# Altium PCB xv11_board.PcbDoc
Units mm, origin at the board's own origin, x right, y up, seen from the top; angles counter-clockwise.
Board outline 33.66 x 33.78 mm, 2 copper layers (Top Layer, Bottom Layer); 11 components, 7 nets, 30 pads, 0 vias.
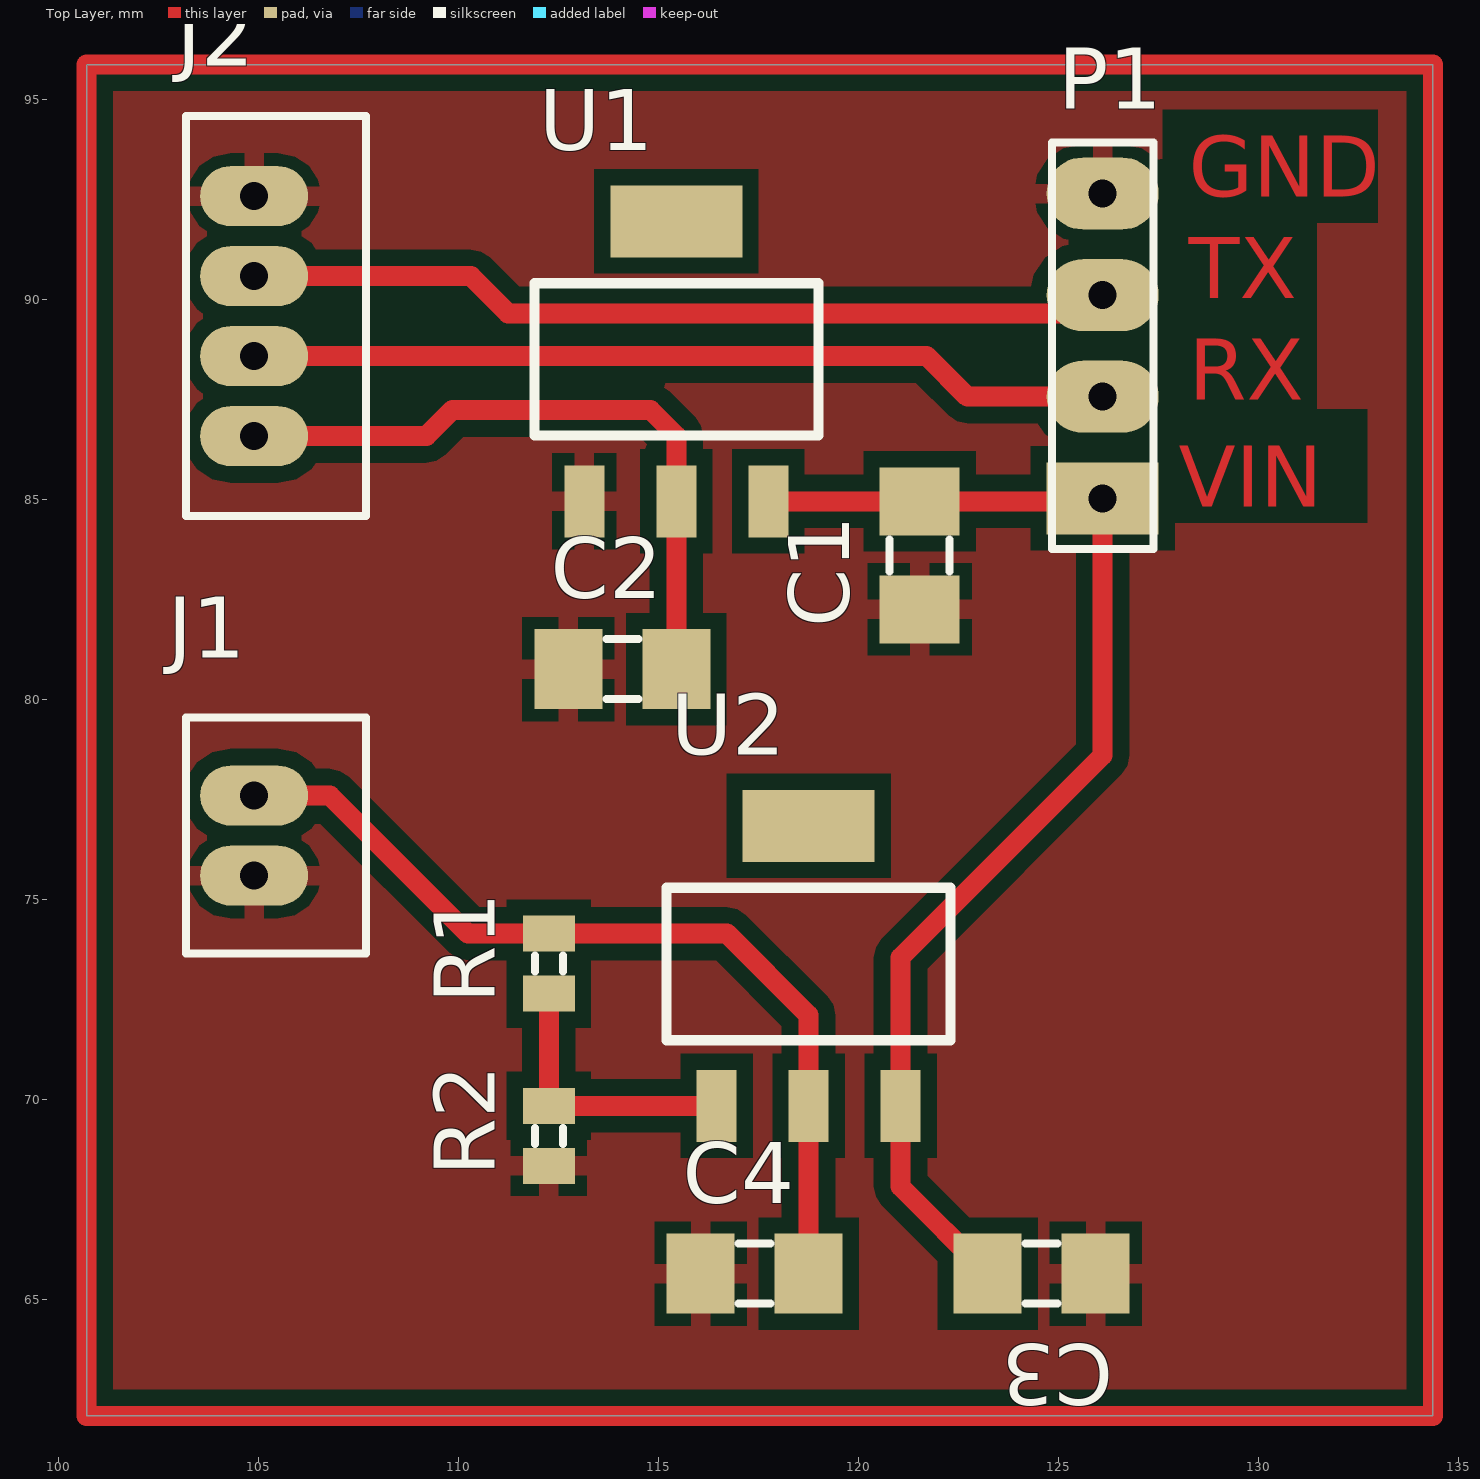
[diagram p0: Top Layer view]
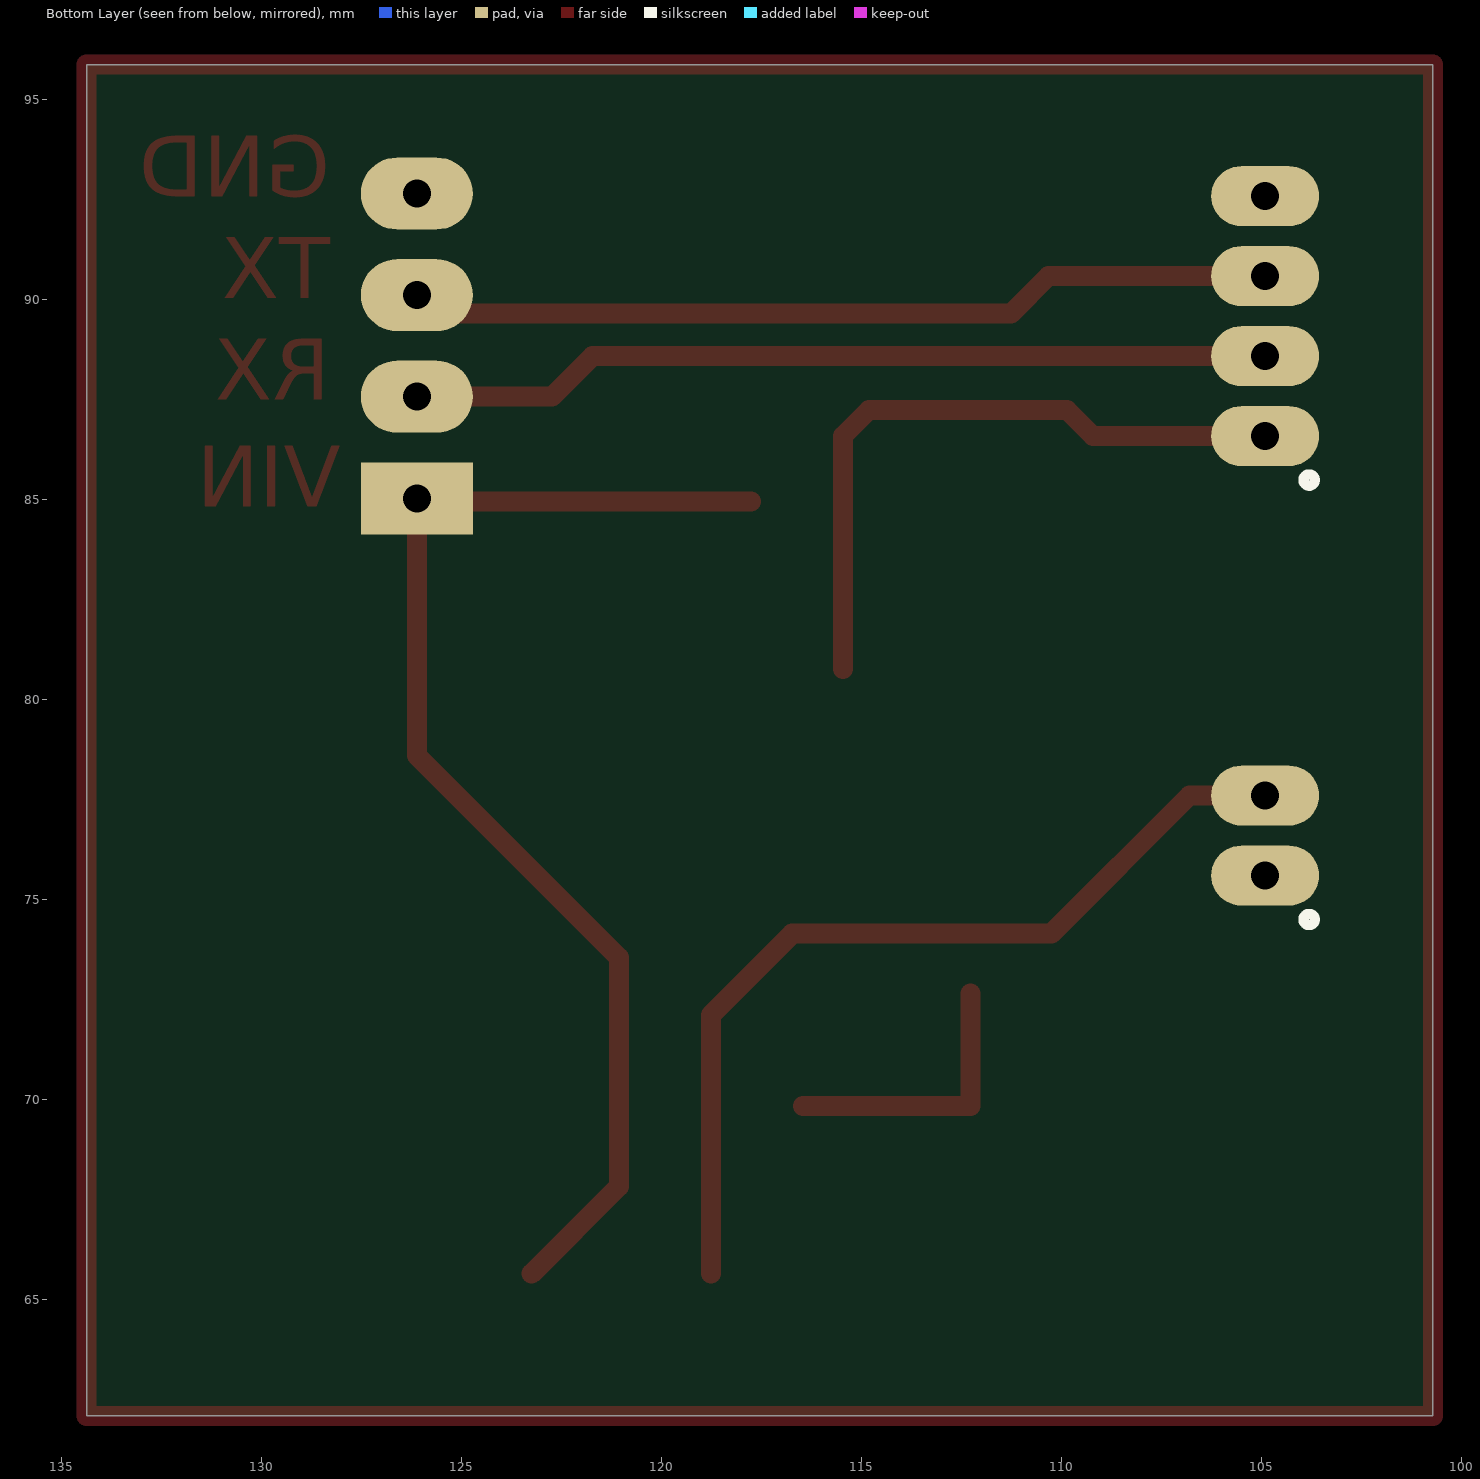
[diagram p1: Bottom Layer view, seen from below]

## Layer stack, top to bottom
Top Solder: solder mask 0.0102, Solder Resist, Dk 3.5
Top Layer: signal copper 0.0356
Dielectric 1: dielectric 0.32, FR-4, Dk 4.8
Bottom Layer: signal copper 0.0356
Bottom Solder: solder mask 0.0102, Solder Resist, Dk 3.5

## Board outline
100.711,62.103 100.711,95.885 134.366,95.885 134.366,62.103

## Design rules (kind name [scope] priority, off if disabled: settings)
Clearance [All] p1: gap=0.4
PolygonConnect [All] p1: connectstyle=Relief reliefconductorwidth=0.5 reliefentries=4 polygonreliefangle="90 Angle" airgapwidth=0.3
RoutingVias [All] p1: holewidth=0.711 width=1.27 viastyle="Through Hole" minholewidth=0.711 minwidth=1.27 maxholewidth=0.711 maxwidth=1.27
SolderMaskExpansion [All] p1: expansion=0.102
Width [All] p1: maxlimit=0.5 minlimit=0.254 preferedwidth=0.254
30 further rules are at their usual default settings.

## Components (designator, comment, footprint, x,y, rotation, side; value= is the part's Value field where it differs from the comment)
C1 "Cap Semi" C1206 121.539,83.613 r90 top
C2 "Cap Semi" C1206 114.107,80.772 r0 top
C3 "Cap Semi" C1206 124.587,65.659 r180 top
C4 "Cap Semi" C1206 117.409,65.659 r0 top
J1 "JST B2B PH" "JST B2B-PH-K" 104.902,76.612 r90 top
J2 "JST B4B PH" "JST B4B-PH-K" 104.902,89.598 r90 top
P1 "Header 4" HDR1X4 126.111,85.042 r90 top
R1 "Res3" J1-0603 112.268,73.406 r90 top
R2 "Res3" J1-0603 112.268,69.1 r90 top
U1 "AMS1117-3.3" SOT-223 113.157,84.963 r0 top
U2 "AMS1117-ADJ" SOT-223 116.459,69.85 r0 top

## Footprints (in the part's own frame and the unit in brackets; to place one, negate y for a bottom-side part, rotate by r counter-clockwise, add the part's x,y. Pads: shape width x height; smd on the part's side, far side on the other; paste and mask are expansions set on the pad)
C1206 [mm] "Chip Capacitor, Body 3.2x1.6mm, IPC High Density"
  rect 1.7x2 smd: 1(-1.35,0) 2(1.35,0)
  silkscreen extent -0.4,-0.75 0.4,0.75, body extent -1.7,-0.9 1.7,0.9, height 1.3
HDR1X4 [mm] "Connector; Header; 4 Position"
  rect 1.8x2.8 hole 0.7: 1(0,0)
  oval 1.8x2.8 hole 0.7: 2(2.54,0) 3(5.08,0) 4(7.62,0)
  silkscreen extent -1.27,-1.27 8.89,1.27
J1-0603 [mm] "Chip Resistor, Body 1.6x0.8mm, IPC High Density"
  rect 0.9x1.3 smd: 1(-0.75,0) 2(0.75,0)
  silkscreen extent -0.2,-0.35 0.2,0.35, body extent -0.85,-0.48 0.85,0.48, height 0.9
"JST B2B-PH-K" [mm]
  oval 1.5x2.7 hole 0.7: 1(-1,0) 2(1,0)
  silkscreen extent -2.95,-2.8 2.95,1.7, body extent -2.95,-2.8 2.95,1.7, height 6
"JST B4B-PH-K" [mm]
  oval 1.5x2.7 hole 0.7: 1(-3,0) 2(-1,0) 3(1,0) 4(3,0)
  silkscreen extent -5,-2.8 5,1.7, body extent -4.95,-2.8 4.95,1.7, height 6
SOT-223 [mm]
  rect 3.3x1.8 smd: 0(2.3,7)
  rect 1x1.8 smd: 1(0,0) 2(2.3,0) 3(4.6,0)
  silkscreen extent -1.25,1.64 5.85,5.45

## Part data
C1 C2 C3 C4: "Capacitor (Semiconductor SIM Model)"
J1: "JST PH Header, 2-Pin"
J2: "JST PH Header, 4-Pin"
P1: "Header, 4-Pin"
R1 R2: "Resistor"
U1: "3.3V  3-Terminal Adjustable Positive Voltage Regulator"
U2: library part AMS1117-3.3, "3.3V  3-Terminal Adjustable Positive Voltage Regulator"

## Nets (pads, with @x,y where several pads share a name; then routed paths per layer and width w, separated by ;. In a path a pad name is that pad's centre, name@x,y a point inside that pad or via, vN(x,y) a via of type N, cw(c..) or ccw(c..) an arc to the next point about the centre after c; other vN are vias at no path point)
3V: C4.2 J1.2 R1.2 U2.2 | length 22.6
  Top Layer w0.5: J1.2 106.792,77.612 110.248,74.156 R1.2 116.725,74.156 118.759,72.122 U2.2 C4.2
3V3: C2.2 J2.1 U1.2 | length 16.9
  Top Layer w0.5: J2.1 109.204,86.598 109.855,87.249 114.808,87.249 115.457,86.6 C2.2
5V: C1.2 C3.2 P1.1 U1.3 U2.3 | length 30.7
  Top Layer w0.5: U1.3 P1.1@126.032,84.963 ; C3.2 121.059,67.837 U2.3 121.059,73.561 126.111,78.613 P1.1
GND: C1.1 C2.1 C3.1 C4.1 J1.1 J2.4 P1.4 R2.1 U1.1
L_RX: J2.2 P1.2 | length 21.6
  Top Layer w0.5: J2.2 121.714,88.598 122.73,87.582 P1.2
L_TX: J2.3 P1.3 | length 21.8
  Top Layer w0.5: J2.3 110.316,90.598 111.252,89.662 125.651,89.662 P1.3
NetR1_1: R1.1 R2.2 U2.1 | length 7
  Top Layer w0.5: R1.1 R2.2 U2.1
pads on no net: U1.0 U2.0
copper on no net: | length 134.9
  Top Layer w0.5: 100.711,62.103 100.711,95.885 134.366,95.885 134.366,62.103 100.711,62.103

## Polygon pours and split planes (outlines as drawn)
GND on Top Layer "Bottom Layer-No Net" (solid, remove dead copper, pour order 0): 100.711,95.885 134.366,95.885 134.366,62.103 100.711,62.103

## Other copper
Top Layer:
  text "GND" at 128.27,92.583 h1.52
  text "TX" at 128.27,90.043 h1.52
  text "RX" at 128.27,87.503 h1.52
  text "VIN" at 128.016,84.836 h1.52